# Altium PCB WIFI0320DD.PCBDOC (part 2 of 3)
Units mm, origin at the board's own origin, x right, y up, seen from the top; angles counter-clockwise.
Board outline 65.79 x 83.95 mm, 2 copper layers (Top Layer, Bottom Layer); 37 components, 30 nets, 200 pads, 45 vias.
Unrouted connection lines stored in the file: 2.
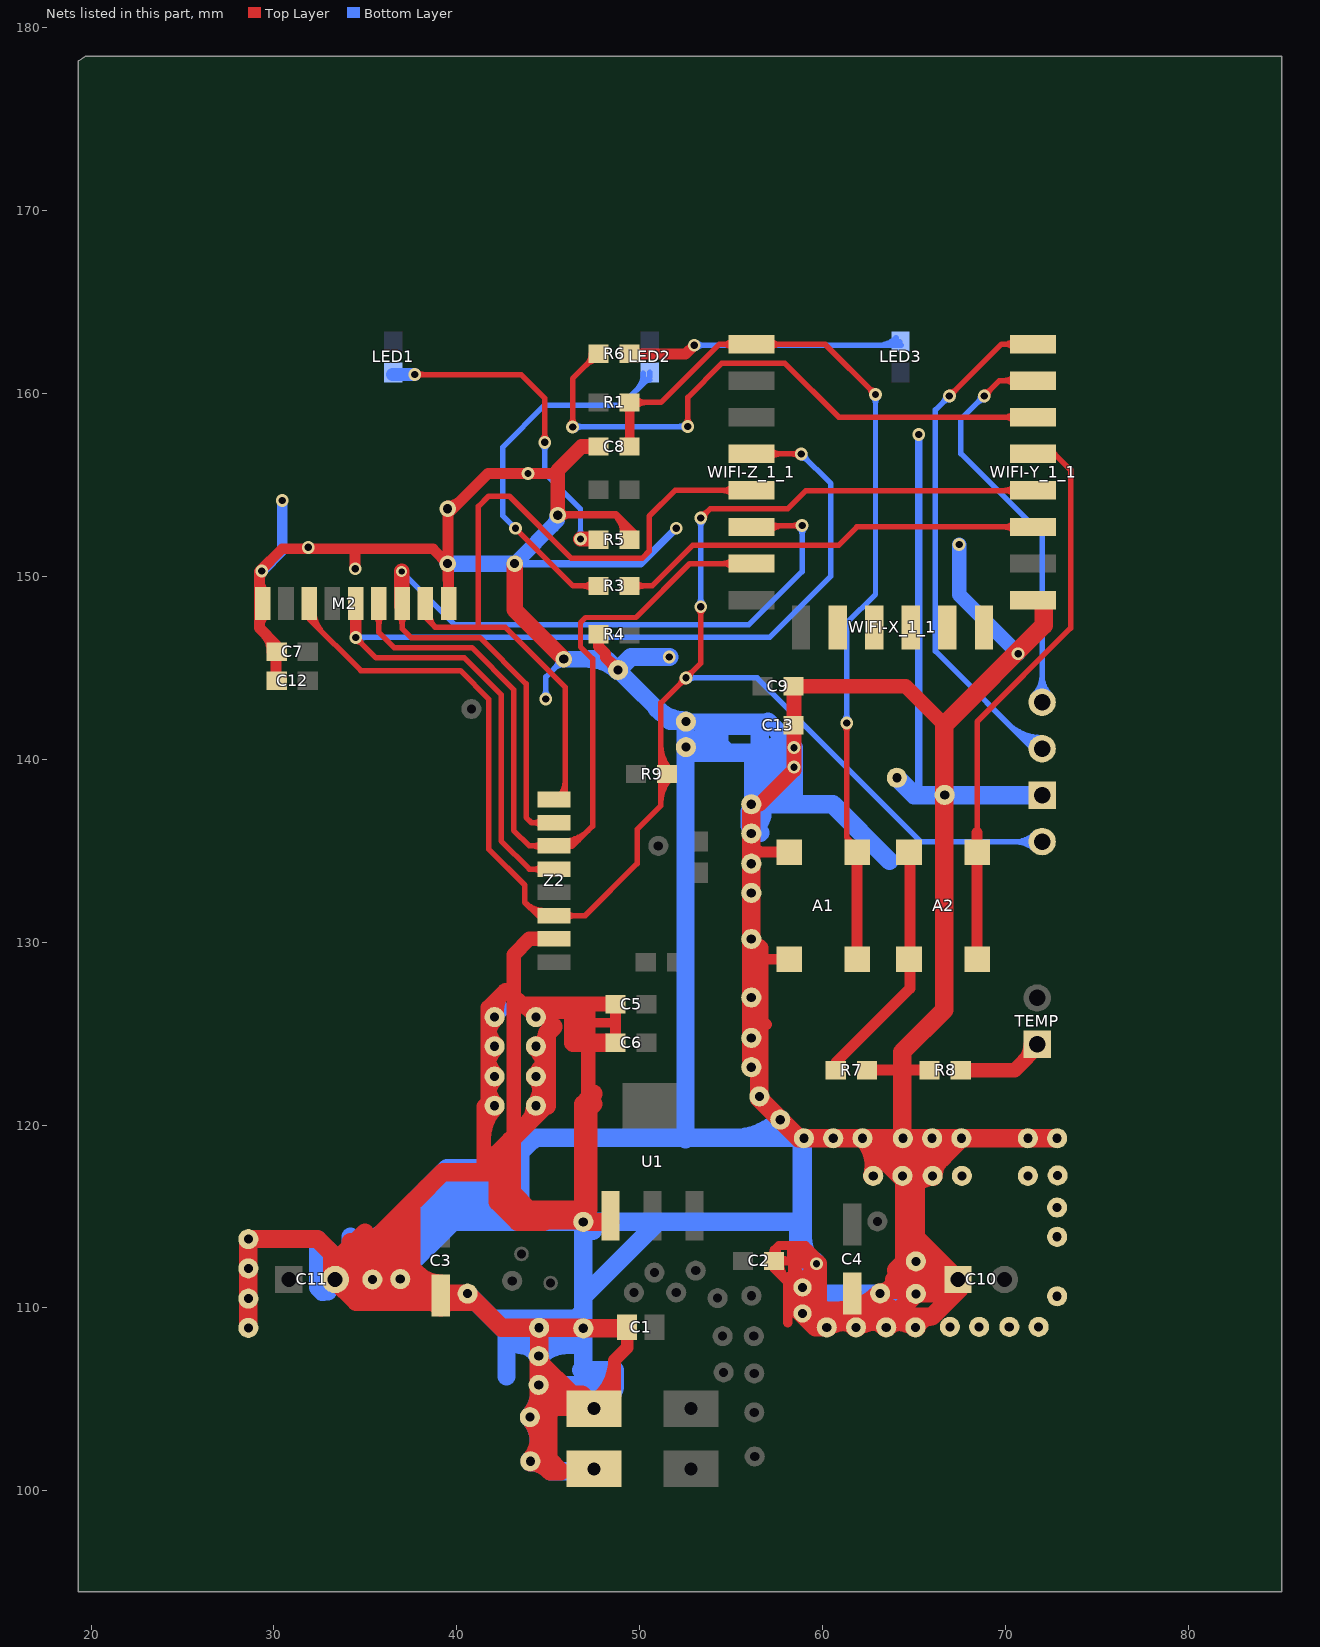
[diagram p2: the nets of this part, all layers, seen from the top]

## Via types
v1: diameter 0.7, hole 0.4, Top Layer to Bottom Layer, 39 vias
v2: diameter 0.9, hole 0.5, Top Layer to Bottom Layer, 5 vias
v3: diameter 0.6, hole 0.35, Top Layer to Bottom Layer, 1 vias

## Nets (pads, with @x,y where several pads share a name; then routed paths per layer and width w, separated by ;. In a path a pad name is that pad's centre, name@x,y a point inside that pad or via, vN(x,y) a via of type N, cw(c..) or ccw(c..) an arc to the next point about the centre after c; other vN are vias at no path point) (continued)
GND: ?.2 A1.2 A1.4 C1.1 C2.2 C3.2 C4.2 C5.2 C6.2 C7.1 C8.2 C9.2 C10.1 C11.2 C12.1 C13.2 M2.8 pad.0 pad.1@47.5,101.2 pad.1@47.5,104.5 pad.5@35.382,111.557 pad.5@36.906,111.582 pad.5@40.589,110.787 pad.5@44.475,105.791 pad.5@44.475,107.366 pad.5@44.499,108.915 pad.5@58.903,109.703 pad.5@58.903,111.125 pad.5@63.144,110.795 pad.5@65.1,110.769 pad.6@28.6,110.514 pad.6@28.6,113.765 pad.6@42.062,122.655 pad.6@42.062,125.907 pad.6@44.323,122.655 pad.6@44.323,125.907 pad.6@46.914,108.89 pad.6@46.914,114.706 pad.6@52.527,140.665 pad.6@56.1,124.764 pad.6@56.1,130.174 pad.6@56.1,132.691 pad.6@56.1,135.942 pad.6@60.225,108.941 pad.6@62.179,119.278 pad.6@62.765,117.221 pad.6@63.476,108.941 pad.6@65.1,112.549 pad.6@66.016,117.221 pad.6@66.675,138.049 pad.6@66.956,108.966 pad.6@67.589,119.278 pad.6@70.207,108.966 pad.6@71.221,117.221 pad.6@72.821,119.278 pad.6@72.822,115.493 pad.7 pad.8@43.993,104.032 pad.8@44.018,101.619 pad.8@56.1,126.974 pad.8@56.54,121.564 pad.8@57.683,120.294 pad.8@58.979,119.278 pad.8@64.389,119.278 R4.1 R5.2 R7.1 R8.2 U1.1 WIFI-Y_1_1.15 Z2.7 | length 1161
  Top Layer w0.4: pad.6@44.205,126 46.371,126 ; pad.6@44.57,125.659 cw(c45.394,124.836) 45.394,126 ; pad.6@44.57,126.154 ccw(c44.942,126.526) 44.942,126 ; v2@45.669,153.365 48.692,153.365 ; v2@45.694,153.163 cw(c46.182,152.675) 46.182,153.365 ; v2@45.694,153.517 ccw(c46.059,153.882) 46.059,153.365 ; R5.2@49.105,152.053 ccw(c47.64,152.313) 48.692,153.365 ; 49.234,152.823 cw(c48.561,152.149) R5.2@49.498,151.982 ; R5.2@49.734,151.716 49.734,152.323 48.692,153.365
  Top Layer w0.5: 47.611,125.592 48.555,125.592 ; C2.2@57.178,112.754 ccw(c56.8,113.154) 57.35,113.154 ; C2.2@57.522,112.754 cw(c57.9,113.154) 57.35,113.154 ; C2.2@57.577,112.396 cw(c58.004,111.969) 58.004,112.573 cw(c58.004,113.176) C2.2@57.577,112.75 ; C2.2@57.587,112.739 cw(c57.954,113.064) 57.607,113.411 ; C2.2@57.65,112.56 ccw(c59.157,112.48) 58.09,111.412 ; 58.09,109.195 58.09,111.125 ; 58.257,111.108 ccw(c58.257,111.771) pad.5@58.726,111.302 ; 58.341,111.108 cw(c58.341,110.564) pad.5@58.726,110.948 ; pad.5@58.736,111.312 ccw(c57.747,112.42) 59.233,112.42 ; pad.5@58.769,111.336 cw(c58.477,111.8) 58.09,111.412 ; pad.5@58.866,111.372 ccw(c58.816,111.709) 59.157,111.709 ; pad.5@58.901,111.375 ccw(c58.899,111.709) 59.233,111.709 59.233,112.42 ; pad.5@58.903,111.125 59.157,111.176 59.157,111.709 ; pad.5@59.03,111.108 58.395,111.108 ; 59.055,112.573 cw(c59.055,111.811) 59.594,112.35 cw(c59.178,111.934) 59.766,111.934 ; 59.224,113.242 cw(c58.403,112.42) 59.565,112.42 ccw(c59.139,112.42) 59.44,112.721 ; 59.233,111.588 cw(c60.05,111.588) v1@59.707,112.33 ; 59.461,111.76 59.512,111.709 59.512,112.268 v1@59.512,112.42 ; 59.512,110.566 59.741,110.795 59.766,110.82 59.766,112.573 v1@59.665,112.573 ; 59.512,111.811 cw(c60.274,111.811) v1@59.735,112.35 ; v1@59.609,112.504 cw(c59.311,112.956) 58.928,112.573 ; v1@59.728,112.498 cw(c60.102,112.954) 59.512,112.954 ; C2.2@57.35,112.573 57.35,113.154 ; C2.2@57.35,112.573 57.35,112.152 58.09,111.412 ; C2.2@57.35,112.573 58.445,112.573 ; 57.35,113.154 57.607,113.411 ; 57.607,113.411 59.055,113.411 59.512,112.954 ; 58.09,111.125 58.09,111.412 ; 58.09,111.125 58.107,111.108 58.395,111.108 ; 58.09,111.412 58.395,111.108 ; 58.09,111.412 58.09,111.709 58.445,111.709 ; 58.395,111.108 cw(c58.395,110.687) 58.713,110.962 ccw(c58.395,110.687) 58.395,111.108 ; 58.395,111.108 ccw(c58.395,111.474) 58.696,111.266 cw(c58.395,111.474) 58.395,111.108 ; 58.395,111.108 58.445,111.158 58.445,111.709 ; 58.445,111.709 59.157,111.709 ; 58.445,112.573 58.699,112.573 ; 58.445,112.573 58.598,112.42 59.08,112.42 ; 58.445,112.573 58.293,112.725 58.293,113.259 58.674,113.259 59.03,112.903 ; 58.699,112.573 58.814,112.687 ; 58.699,112.573 58.928,112.573 ; 58.699,112.573 58.572,112.7 58.572,112.928 58.814,112.687 ; 58.814,112.687 59.03,112.903 ; 58.814,112.687 58.928,112.573 ; 58.928,112.573 59.08,112.42 ; 58.928,112.573 59.233,112.573 ; 59.03,112.903 59.08,112.954 59.207,112.954 v1@59.512,112.649 ; 59.03,112.903 59.182,112.903 v1@59.512,112.573 ; 59.08,112.42 59.233,112.42 ; 59.233,112.42 v1@59.512,112.42 ; 59.233,112.42 59.233,112.573 ; 59.233,112.573 cw(c59.233,112.177) 59.577,112.371 ccw(c59.233,112.177) 59.233,112.573 ; 59.233,112.573 v1@59.512,112.573 ; v1@59.512,112.42 v1(59.665,112.42) v1@59.512,112.573 ; v1@59.512,112.42 v1@59.512,112.573 ; v1@59.512,112.573 v1@59.512,112.649 ; v1@59.512,112.573 v1@59.588,112.573 ; v1@59.512,112.649 v1@59.588,112.573 ; v1@59.512,112.649 59.512,112.954 ; 59.512,112.954 cw(c59.227,112.669) 59.578,112.47 ccw(c59.227,112.669) 59.512,112.954 ; 59.512,112.954 59.665,112.801 v1@59.665,112.573 ; v1@59.588,112.573 59.665,112.497 v1@59.665,112.573 ; v1@59.588,112.573 v1@59.665,112.573
  Top Layer w0.6: 29.21,147.307 cw(c30.119,147.307) M2.8@29.476,147.95 ; 29.21,149.719 ccw(c30.119,149.719) M2.8@29.476,149.077 ; 29.21,149.864 cw(c29.764,149.864) v1@29.372,150.256 ; 29.472,146.906 cw(c28.439,145.872) C7.1@29.9,145.872 ; C12.1@29.959,144.439 ccw(c29.558,144.839) 30.124,144.839 ; C7.1@29.959,145.731 cw(c29.558,145.331) 30.124,145.331 ; C12.1@30.29,144.297 30.124,144.463 30.124,146.253 29.21,147.168 29.21,150.266 30.455,151.511 38.684,151.511 39.55,150.645 pad.0@39.55,148.513 ; v1(34.442,150.419) 34.442,151.486 ; pad.5@36.906,111.832 ccw(c36.906,112.436) 37.333,112.009 ccw(c37.76,111.582) pad.5@37.156,111.582 ; pad.5@36.942,111.618 37.516,112.192 37.705,112.381 37.705,115.887 ; v2@39.387,150.596 cw(c38.994,150.203) 39.55,150.203 ; v2@39.497,153.845 ccw(c39.497,154.882) 40.23,154.149 ; 39.522,149.794 39.522,153.441 41.707,155.626 45.466,155.626 45.517,155.575 ; R4.1@47.75,146.837 47.75,146.157 48.126,145.781 48.126,145.575 pad.7@48.807,144.893 ; pad.7@48.569,144.882 ccw(c47.965,144.882) 48.392,145.308 ccw(c48.819,145.735) pad.7@48.819,145.132 ; C6.2@48.68,124.511 C5.2@48.68,126.6 ; 56.236,135.001 56.49,135.001 56.572,134.919 A1.4@58.166,134.919 ; 56.54,125.882 56.923,125.5 ; 56.54,129.134 56.608,129.066 A1.2@58.166,129.066 ; 56.54,129.667 56.591,129.718 ; R7.1@62.42,123 64.35,123 R8.2@65.85,123 ; pad.5@63.144,111.045 ccw(c63.144,111.648) 63.571,111.222 ccw(c63.998,110.795) pad.5@63.394,110.795 ; pad.5@63.321,110.618 cw(c63.748,110.191) 63.748,110.795 cw(c63.748,111.398) pad.5@63.321,110.972 ; pad.8@63.869,119.278 64.262,118.886 64.262,117.272 64.262,117.195 64.262,112.319 64.262,112.065 64.262,111.912 63.907,111.557 pad.5@63.144,110.795 pad.5@65.075,110.795 ; 64.262,113.727 ccw(c66.279,113.727) pad.6@64.853,112.301 ; 64.262,115.176 ccw(c67.727,115.176) pad.6@65.277,112.725 ; 64.262,116.37 cw(c65.216,116.37) pad.7@64.541,117.044 ; 64.262,118.072 ccw(c65.216,118.072) pad.7@64.541,117.398 ; 64.262,118.369 cw(c65.298,118.369) pad.8@64.566,119.102 ; 64.435,110.795 cw(c64.435,110.105) pad.5@64.923,110.593 ; WIFI-Y_1_1.15@72.104,148.702 WIFI-Y_1_1.15@72.104,148.749
  Top Layer w0.7: pad.1@47.593,105.007 ccw(c45.885,107.137) 48.616,107.137 ; pad.1@48.031,104.461 ccw(c47.055,105.679) 48.616,105.679 ; pad.1@48.616,104.14 48.616,107.137 ; C1.1@49.313,108.941 49.313,107.835 48.616,107.137 ; 58.445,111.709 58.445,112.573 ccw(c60.325,112.573) pad.5@59.008,111.232
  Top Layer w0.8: 41.478,119.283 cw(c43.835,119.283) pad.7@42.168,120.949 ; pad.7@41.707,121.435 cw(c43.283,121.435) pad.6@42.168,122.549 ; pad.6@41.707,122.276 ccw(c43.283,122.276) pad.7@42.168,121.161 ; 41.707,123.086 cw(c43.283,123.086) pad.7@42.168,124.201 ; 41.707,123.876 ccw(c43.283,123.876) pad.6@42.168,122.761 ; pad.7@41.707,124.686 cw(c43.283,124.686) pad.6@42.168,125.801 ; pad.6@41.707,125.527 ccw(c43.283,125.527) pad.7@42.168,124.413 ; pad.6@42.209,125.936 cw(c43.777,126.25) 42.647,127.381 41.707,126.441 41.707,121.26 41.478,121.031 41.478,117.97 42.024,117.424 42.228,117.22 43.104,116.345 ; 42.723,127.33 43.104,126.949 ; 43.104,115.646 43.104,116.345 ; 43.358,126.848 43.586,126.619 ; pad.6@44.205,126 43.586,126.619 ; pad.6@44.429,125.801 cw(c46.405,123.825) 46.405,126.619 ; Z2.7@45.314,130.18 43.972,130.18 43.104,129.311 43.104,126.949 ; v2(45.517,153.34) 45.517,155.575 45.517,155.804 46.813,157.1 C8.2@47.75,157.1 ; pad.6@46.808,114.812 ccw(c45.877,115.743) 47.193,115.743 ; C5.2@48.68,126.6 48.661,126.619 47.193,126.619 ; pad.7@56.566,137.542 58.432,139.408 v1(58.432,139.572) v1(58.432,140.639) 58.432,143.485 ; C9.2@58.406,143.993 64.541,143.993 66.65,141.884 ; 43.104,116.345 44.069,115.379 44.746,114.703 46.914,114.703 47.193,114.982 47.193,115.379 ; 43.104,116.345 43.104,119.329 43.104,126.949 ; 43.104,126.949 43.434,126.619 43.586,126.619 ; 43.586,126.619 47.193,126.619 ; 47.193,115.379 cw(c46.601,115.379) 46.851,114.842 ccw(c46.601,115.379) 47.193,115.379 ; 47.193,115.379 47.193,121.437 47.193,124.5 47.193,126.619
  Top Layer w0.9: v2(43.155,150.698) 43.155,148.174 v2(45.847,145.482)
  Top Layer w1: pad.7@28.6,108.914 pad.6@28.6,110.514 pad.7@28.6,112.165 pad.6@28.6,113.765 32.386,113.765 33.173,112.978 C11.2@33.173,111.734 ; 33.173,112.587 ccw(c34.381,112.587) C11.2@33.527,111.734 ; C11.2@33.35,111.807 ccw(c33.35,115.047) 35.641,112.756 ; C11.2@33.391,111.31 cw(c33.696,109.49) 35.001,110.795 ; C11.2@33.598,111.588 cw(c35.696,111.852) 34.201,113.347 ; C11.2@33.599,111.584 cw(c35.685,111.812) 34.201,113.297 ; 34.201,113.602 34.201,113.347 ; pad.5@35.36,111.512 ccw(c34.914,110.628) 34.214,111.328 34.341,111.455 ; pad.5@35.382,111.607 ccw(c35.382,112.402) 35.945,111.84 ; pad.5@35.393,111.606 ccw(c35.758,113.187) pad.5@36.906,112.039 ; pad.5@35.424,111.585 ccw(c36.906,112.581) 36.906,110.795 ; pad.5@35.432,111.557 cw(c37.822,111.557) 36.132,113.246 ; 36.144,113.767 36.906,113.767 36.906,113.335 ; 36.424,112.868 ccw(c38.192,112.868) 36.942,111.618 ccw(c38.913,113.567) C3.2@38.913,110.795 ; pad.5@36.869,111.616 cw(c35.001,113.33) 35.001,110.795 ; pad.5@36.91,111.532 cw(c37.113,108.995) C3.2@38.913,110.795 ; 37.705,115.887 39.243,117.424 42.024,117.424 42.228,117.424 ; 37.845,111.863 ccw(c39.114,113.132) C3.2@39.114,111.337 ; 38.333,116.54 37.135,115.341 ; 38.367,110.346 cw(c38.367,109.29) 39.114,110.037 cw(c39.861,109.29) 39.861,110.346 ; C3.2@39.405,110.346 ccw(c39.405,111.971) pad.5@40.554,110.822 ; 42.988,119.214 ccw(c44.702,117.5) 42.278,117.5 ccw(c44.761,117.5) 43.006,115.744 ; 43.879,120.105 ccw(c42.928,121.055) pad.7@44.273,121.055 ; pad.8@43.957,103.996 cw(c42.707,102.746) 44.475,102.746 ; pad.8@43.957,104.067 ccw(c42.707,105.318) pad.5@44.475,105.318 ; pad.8@43.958,103.996 cw(c41.565,101.519) 45.009,101.519 ; pad.8@43.986,104.081 ccw(c43.821,105.258) 45.009,105.258 ; pad.8@43.995,104.082 ccw(c44.085,105.857) 45.342,104.6 ; pad.8@44.018,101.569 cw(c44.018,100.144) 45.026,101.151 ; pad.8@44.028,101.57 cw(c44.382,99.78) 45.673,101.07 ; pad.7@44.288,121.091 ccw(c42.731,122.648) 44.933,122.648 ; pad.6@44.288,122.62 cw(c42.731,121.063) 44.933,121.063 ; pad.6@44.288,122.691 ccw(c42.731,124.248) 44.933,124.248 ; pad.7@44.288,124.271 cw(c42.731,122.714) 44.933,122.714 ; pad.6@44.291,122.617 cw(c43.725,121.92) pad.7@44.507,121.48 ; pad.7@44.319,124.356 ccw(c44.268,125.019) 44.933,125.019 ; pad.5@44.44,105.756 cw(c43.067,104.383) 45.009,104.383 ; 44.475,102.843 cw(c42.794,102.843) 43.983,101.654 ccw(c41.506,104.131) 45.009,104.131 ; pad.5@44.488,105.743 cw(c44.963,103.939) pad.1@46.282,105.258 ; pad.5@44.525,107.366 ccw(c45.375,107.366) 44.774,106.765 ; 44.746,114.703 44.047,114.703 ; 45.168,115.379 cw(c45.168,112.961) pad.6@46.878,114.671 ; 45.288,125.375 44.933,125.019 ; 45.482,105.719 cw(c44.372,103.796) pad.1@46.517,104.371 ; 45.666,105.032 45.666,104.6 ; pad.1@46.119,105.42 cw(c45.198,104.5) pad.1@46.5,104.5 ; pad.1@46.213,105.326 ccw(c47,106.113) pad.1@47,105 ; 46.371,126 46.366,125.995 46.366,124.5 47.193,124.5 C6.2@48.68,124.5 ; pad.6@46.914,108.89 pad.6@46.939,108.89 ; pad.6@46.914,114.703 U1.1@48.398,114.703 ; pad.6@46.914,114.706 46.914,115.379 ; pad.6@46.965,108.864 pad.6@46.939,108.89 ; 47.473,121.158 47.193,120.879 47.193,115.379 46.914,115.379 ; 47.473,121.717 47.193,121.437 46.914,121.158 46.914,115.379 ; pad.7@48.807,144.893 pad.7@48.819,144.882 ; C1.1@49.313,108.941 49.263,108.89 pad.6@46.939,108.89 ; pad.7@56.1,137.542 pad.6@56.1,135.942 pad.7@56.1,134.291 pad.6@56.1,132.691 pad.6@56.1,130.174 56.1,128.574 pad.8@56.1,126.974 pad.6@56.1,124.764 56.1,123.605 pad.7@56.54,123.164 ; 56.54,129.667 56.54,129.134 56.54,125.882 pad.7@56.54,123.164 ; 58.33,110.224 59.614,108.941 pad.6@60.225,108.941 ; 58.395,110.491 cw(c59.044,110.491) pad.5@58.903,111.125 ; 58.395,111.379 58.395,111.108 58.395,110.746 ; 58.822,110.515 ccw(c58.127,110.917) pad.5@58.903,111.125 ; pad.5@58.826,111.25 59.03,111.453 59.03,111.108 59.03,110.82 pad.5@58.956,110.746 ; pad.5@59.097,109.458 ccw(c60.225,110.586) pad.6@60.225,108.991 ; 59.316,110.128 cw(c60.313,111.125) pad.5@58.903,111.125 ; 59.512,109.785 ccw(c57.734,109.785) pad.5@58.903,111.125 ; 59.512,111.709 59.512,110.566 ; v1@59.512,112.268 v1(59.665,112.42) v1@59.741,112.42 ; 59.741,109.866 ccw(c58.376,109.866) pad.5@58.903,111.125 ; 59.741,110.224 ccw(c58.838,110.224) pad.5@58.903,111.125 ; 60.15,109.531 ccw(c60.15,111.601) C4.2@61.614,110.137 ; pad.6@60.18,108.964 ccw(c59.509,109.318) 60.046,109.855 ; pad.6@60.182,108.966 ccw(c59.556,109.34) 60.071,109.855 ; 60.279,109.531 cw(c60.279,107.395) pad.7@61.789,108.905 ; pad.6@60.666,109.127 cw(c61.094,108.341) pad.7@61.786,108.909 ; 60.755,109.855 ccw(c60.755,113.184) pad.5@63.109,110.83 ; 60.933,109.855 ccw(c60.933,110.818) C4.2@61.614,110.137 ; C4.2@61.148,109.855 cw(c61.148,106.612) 63.44,108.905 ccw(c61.93,107.395) 61.93,109.531 ; C4.2@61.614,110.787 C4.2@61.614,110.795 ; 61.77,109.531 ccw(c61.77,107.395) 60.26,108.905 cw(c62.553,106.612) 62.553,109.855 ; pad.7@61.782,108.914 ccw(c60.071,107.829) 60.071,109.855 ; pad.7@62.287,109.135 cw(c62.724,108.322) pad.6@63.437,108.909 ; 62.295,109.855 cw(c62.295,110.818) C4.2@61.614,110.137 ; pad.6@62.716,117.234 ccw(c60.696,117.795) pad.6@62.179,119.278 ; 63.078,109.531 cw(c63.078,111.601) C4.2@61.614,110.137 ; pad.5@63.194,110.797 ccw(c64.186,110.848) 64.186,109.855 ; 63.37,109.531 ccw(c63.37,107.395) 61.86,108.905 cw(c64.153,106.612) 64.153,109.855 ; pad.6@63.511,108.905 cw(c65.021,107.395) 65.021,109.531 ; pad.6@63.514,108.909 cw(c64.206,108.341) pad.7@64.635,109.127 ; 63.53,109.531 cw(c63.53,107.395) pad.7@65.04,108.905 ; 63.869,117.903 cw(c65.764,117.903) pad.8@64.424,119.243 ; 63.869,118.538 ccw(c65.681,118.538) pad.7@64.4,117.256 ; pad.7@64.329,117.186 cw(c62.836,115.692) 64.948,115.692 ; pad.7@64.35,117.173 cw(c64.094,116.359) 64.948,116.359 ; pad.7@64.361,117.171 cw(c64.295,116.368) 65.1,116.368 ; pad.7@64.365,117.271 ccw(c64.365,120.209) 66.442,118.131 ; 64.425,112.319 ccw(c64.425,113.224) pad.6@65.065,112.584 ; pad.6@65.051,112.555 cw(c63.907,112.712) 63.907,111.557 ; pad.5@65.053,110.752 ccw(c63.907,110.338) 63.907,111.557 ; pad.6@65.054,112.531 cw(c64.512,112.322) 64.922,111.912 ; pad.6@65.061,112.579 cw(c64.008,113.399) 64.008,112.065 ; pad.6@65.064,112.583 cw(c64.44,113.188) 64.44,112.319 ; pad.6@65.099,112.499 ccw(c65.057,111.016) 64.008,112.065 ; pad.5@65.1,110.769 pad.5@65.1,110.795 ; pad.6@65.102,112.499 cw(c65.182,109.454) C10.1@67.335,111.608 ; 65.103,116.793 cw(c66.016,115.881) pad.6@66.016,117.171 ; 65.114,118.72 pad.7@65.673,119.278 ; pad.7@65.123,108.924 cw(c65.97,108.637) 65.97,109.531 ; pad.5@65.136,110.734 cw(c67.122,108.747) C10.1@67.122,111.557 ; pad.6@65.138,112.581 ccw(c67.335,114.425) C10.1@67.335,111.557 ; 65.182,117.475 cw(c65.366,116.737) pad.6@65.976,117.191 ; 65.364,118.969 cw(c65.989,118.344) pad.7@65.989,119.228 ; 65.58,118.412 ccw(c64.713,119.278) pad.7@65.939,119.278 ; pad.6@66.066,117.221 cw(c67.356,117.221) 66.444,118.133 ; pad.6@66.066,117.222 cw(c67.284,117.239) 66.56,118.219 ; 66.552,110.113 ccw(c65.108,111.557) C10.1@67.15,111.557 ; 66.631,111.425 cw(c66.851,110.605) C10.1@67.275,111.34 ; C10.1@67.18,111.439 ccw(c65.202,110.38) pad.6@65.202,112.624 ; C10.1@67.216,111.726 cw(c65.1,113.663) pad.5@65.1,110.795 ; C10.1@67.4,111.557 C10.1@67.335,111.557 ; WIFI-Y_1_1.15@72.085,148.666 72.085,147.32 66.65,141.884 66.65,126.289 64.35,123.989 64.35,123 pad.8@64.35,119.278 ; pad.6@72.821,119.278 pad.7@71.221,119.278 pad.6@67.589,119.278 ; C11.2@33.173,111.734 ccw(c32.317,112.59) 33.528,112.59 cw(c32.317,112.59) C11.2@33.173,111.734 ; C11.2@33.35,111.557 34.976,113.182 ; C11.2@33.35,111.557 34.239,111.557 ; C11.2@33.35,111.557 33.35,111.481 34.484,110.346 41.03,110.346 ; C11.2@33.527,111.733 cw(c33.999,112.203) 33.528,112.674 ; C11.2@33.527,111.733 cw(c33.973,112.178) 33.528,112.624 ; 33.528,112.624 33.528,112.674 ; 33.528,112.624 34.201,113.297 ; 33.528,112.674 34.201,113.347 ; 34.201,113.297 34.201,113.347 ; 34.201,113.347 34.976,114.122 34.976,113.182 ; 34.239,111.557 34.341,111.455 ; 34.239,111.557 34.442,111.557 ; 34.341,111.455 cw(c34.881,110.915) 35.351,111.517 ccw(c34.881,110.915) 34.341,111.455 ; 34.341,111.455 35.001,110.795 ; 34.341,111.455 34.442,111.557 ; 34.442,111.557 pad.5@35.382,111.557 pad.5@35.662,111.557 ; 34.442,111.557 34.544,111.658 ; 34.544,111.658 36.424,113.538 36.424,112.497 ; 34.544,111.658 35.585,111.658 36.424,112.497 ; 34.976,113.182 37.135,115.341 ; 35.001,110.795 36.906,110.795 ; pad.5@35.662,111.557 36.424,112.319 ; pad.5@35.662,111.557 pad.5@36.424,111.557 ; pad.5@36.424,111.557 36.424,112.319 ; pad.5@36.424,111.557 pad.5@36.906,112.039 ; pad.5@36.424,111.557 pad.5@36.906,111.557 ; 36.424,112.319 ccw(c37.149,112.319) 36.922,111.63 cw(c37.149,112.319) 36.424,112.319 ; 36.424,112.319 36.906,112.801 ; 36.424,112.319 36.424,112.497 ; 36.424,112.497 ccw(c37.425,112.497) 36.931,111.626 cw(c37.425,112.497) 36.424,112.497 ; 36.906,110.795 C3.2@38.913,110.795 ; 36.906,110.795 pad.5@36.906,111.557 ; pad.5@36.906,111.557 pad.5@36.906,111.582 pad.5@36.906,112.039 ; pad.5@36.906,112.039 36.906,112.801 ; 36.906,112.801 37.516,112.192 C3.2@38.913,110.795 ; 36.906,112.801 36.906,113.335 ; 36.906,113.335 37.135,113.563 37.135,115.341 ; C3.2@38.913,110.795 C3.2@39.114,110.795 ; C3.2@38.913,110.795 39.021,110.687 C3.2@39.114,110.687 C3.2@39.114,110.787 ; C3.2@39.114,110.787 pad.5@40.589,110.787 ; C3.2@39.114,110.787 C3.2@39.114,110.795 ; C3.2@39.114,110.795 40.581,110.795 pad.5@40.589,110.787 ; pad.5@40.589,110.787 41.03,110.346 ; 41.03,110.346 42.461,108.915 pad.5@44.499,108.915 ; 42.228,116.522 43.104,115.646 43.37,115.379 ; 42.228,116.522 42.228,117.22 42.228,117.424 ; 42.228,116.522 42.228,115.81 42.659,115.379 ; 42.228,117.424 42.228,118.454 43.104,119.329 44.933,121.158 44.933,125.019 ; 42.659,115.379 43.37,115.379 ; 42.659,115.379 43.336,114.703 44.047,114.703 ; 43.37,115.379 44.047,114.703 ; 43.37,115.379 44.069,115.379 46.914,115.379 ; 44.475,103.734 44.475,101.702 45.107,101.07 45.673,101.07 ; 44.475,103.734 44.475,104.724 ; 44.475,103.734 45.009,104.267 ; 44.475,104.724 cw(c43.809,104.724) 43.98,104.08 ccw(c43.809,104.724) 44.475,104.724 ; 44.475,104.724 45.009,105.258 ; 44.475,104.724 pad.5@44.475,105.791 ; pad.5@44.475,105.791 pad.5@44.475,107.064 ; pad.5@44.475,105.791 45.009,105.258 ; pad.5@44.475,107.064 pad.1@46.282,105.258 ; pad.5@44.475,107.064 pad.5@44.475,107.366 44.499,107.366 pad.5@44.499,108.915 ; pad.5@44.499,108.915 46.914,108.915 pad.6@46.939,108.89 ; 45.009,104.267 cw(c44.372,104.904) 44.013,104.078 ccw(c44.372,104.904) 45.009,104.267 ; 45.009,104.267 45.009,101.734 45.673,101.07 ; 45.009,104.267 45.009,105.258 ; 45.009,104.267 45.342,104.6 ; 45.009,105.258 45.666,104.6 ; 45.342,104.6 45.666,104.6 ; 45.666,104.6 45.999,104.6 ; 45.999,104.6 pad.1@47.5,104.6 ; 45.999,104.6 pad.1@46.939,104.6 ; pad.1@46.282,105.258 pad.1@46.939,104.6 ; pad.1@46.282,105.258 46.842,105.258 pad.1@47.5,104.6 ; pad.1@46.939,104.6 pad.1@47.5,104.6 ; pad.7@56.54,123.164 pad.8@56.54,121.564 56.54,121.437 pad.8@57.683,120.294 58.699,119.278 pad.8@58.979,119.278 pad.7@60.579,119.278 pad.6@62.179,119.278 ; 58.395,110.746 ccw(c58.395,111.276) pad.5@58.903,111.125 ; 58.395,110.746 pad.5@58.956,110.746 ; 58.826,110.617 cw(c58.324,110.115) pad.5@58.903,109.703 ; 58.826,110.617 59.512,109.931 ; 58.826,110.617 pad.5@58.956,110.746 ; pad.5@58.903,109.703 cw(c59.507,110.195) pad.5@58.956,110.746 ; pad.5@58.903,109.703 ccw(c58.61,110.795) 59.741,110.795 ; pad.5@58.903,109.703 ccw(c58.793,110.414) 59.512,110.414 ; pad.5@58.903,109.703 cw(c59.286,108.904) 59.913,109.531 ; pad.5@58.903,109.703 ccw(c58.793,110.414) 59.512,110.414 ; pad.5@58.903,109.703 ccw(c58.596,110.566) 59.512,110.566 ; pad.5@58.903,111.125 ccw(c58.321,112.42) v1@59.741,112.42 ; pad.5@58.903,111.125 cw(c58.647,110.298) 59.512,110.298 ccw(c58.647,110.298) pad.5@58.903,111.125 ; pad.5@58.903,111.125 cw(c58.488,110.188) 59.512,110.188 ccw(c58.488,110.188) pad.5@58.903,111.125 ; pad.5@58.903,111.125 ccw(c58.903,110.617) 58.395,110.617 cw(c58.903,110.617) pad.5@58.903,111.125 ; pad.5@58.956,110.746 59.18,110.746 59.512,110.414 ; 59.512,109.931 59.512,110.414 ; 59.512,109.931 59.588,109.855 ; 59.512,110.414 59.741,110.185 ; 59.512,110.414 59.512,110.566 ; 59.588,109.855 60.046,109.855 ; 59.588,109.855 59.913,109.531 ; 59.741,110.16 cw(c58.675,109.094) 60.175,108.946 ccw(c58.67,109.115) 59.741,110.185 ; 59.741,110.16 59.741,110.185 ; 59.741,110.16 60.046,109.855 ; 59.741,110.185 59.741,110.795 ; 59.741,110.185 60.071,109.855 ; 59.741,110.795 v1@59.741,112.42 ; 59.913,109.531 65.97,109.531 ; 60.046,109.855 60.071,109.855 ; 60.071,109.855 64.186,109.855 ; pad.6@62.179,119.278 64.262,117.195 64.273,117.184 pad.7@64.35,117.184 ; pad.6@62.179,119.278 pad.8@63.869,119.278 ; pad.8@63.869,119.278 63.869,117.665 64.262,117.272 pad.7@64.35,117.184 ; pad.8@63.869,119.278 pad.8@64.35,119.278 ; 63.907,111.557 65.1,111.557 ; 64.008,112.065 64.262,112.065 ; 64.008,112.065 64.262,112.319 ; 64.186,109.855 65.075,110.744 65.075,110.795 pad.5@65.1,110.795 ; 64.262,112.065 ccw(c64.262,112.94) 65.055,112.57 cw(c64.262,112.94) 64.262,112.065 ; 64.262,112.065 64.643,112.065 ; 64.262,112.319 cw(c64.816,111.765) 65.083,112.502 ccw(c64.816,111.765) 64.262,112.319 ; 64.262,112.319 pad.6@64.948,113.005 ; 64.262,112.319 64.44,112.319 ; pad.7@64.35,117.184 pad.8@64.35,119.278 ; pad.7@64.35,117.184 64.948,116.586 ; pad.8@64.35,119.278 pad.8@64.389,119.278 pad.7@65.673,119.278 ; 64.44,112.319 64.668,112.09 ; 64.643,112.065 64.668,112.09 ; 64.643,112.065 64.491,111.912 64.922,111.912 ; 64.643,112.065 64.694,112.065 64.668,112.09 ; 64.668,112.09 pad.6@64.948,112.37 ; 64.922,111.912 65.049,112.039 64.948,112.141 pad.6@64.948,112.37 ; pad.6@64.948,112.37 pad.6@64.948,113.005 ; pad.6@64.948,112.37 pad.6@65.1,112.522 ; pad.6@64.948,113.005 65.1,113.157 ; pad.6@64.948,113.005 64.948,116.586 ; 64.948,116.586 65.1,116.434 65.1,113.843 ; pad.5@65.1,110.795 66.624,110.795 67.335,111.506 C10.1@67.335,111.557 ; pad.5@65.1,110.795 65.1,111.557 ; 65.1,111.557 pad.6@65.1,112.522 ; 65.1,111.557 C10.1@67.335,111.557 ; pad.6@65.1,112.522 65.1,113.157 ; pad.6@65.1,112.522 pad.6@65.202,112.624 ; 65.1,113.157 65.1,113.843 ; 65.1,113.843 C10.1@67.335,111.608 ; pad.6@65.202,112.624 66.269,112.624 C10.1@67.335,111.557 ; pad.7@65.673,119.278 pad.7@65.989,119.278 ; 65.97,109.531 67.513,111.074 67.513,111.379 C10.1@67.335,111.557 ; pad.7@65.989,119.278 pad.6@67.589,119.278 ; pad.7@65.989,119.278 65.989,118.821 65.1,117.932 65.1,116.79 pad.6@67.589,119.278 ; C10.1@67.335,111.557 C10.1@67.335,111.608 ; C11.2@33.527,111.38 cw(c34.199,110.708) 34.199,111.658 ccw(c34.199,110.708) C11.2@33.527,111.38 ; pad.8@43.99,103.982 cw(c43.957,103.464) 44.475,103.464 ccw(c43.957,103.464) pad.8@43.99,103.982 ; pad.5@44.463,105.743 cw(c44.279,105.037) 45.009,105.037 ccw(c44.279,105.037) pad.5@44.463,105.743 ; 59.943,109.501 cw(c59.382,108.941) 60.175,108.941 ccw(c59.382,108.941) 59.943,109.501
  Bottom Layer w0.3: v1@44.724,143.436 ccw(c44.383,143.778) 44.865,143.778 ccw(c45.348,143.778) v1@45.007,143.436 ; v1(44.865,143.295) 44.865,144.5 v2(45.847,145.482) ; v2@45.547,145.482 cw(c44.823,145.482) 45.335,144.97 cw(c45.847,144.457) v2@45.847,145.182
  Bottom Layer w0.4: v2(43.155,150.698) 50.063,150.698 v1(51.994,152.629) ; 65.253,138.04 v1(65.253,157.759)
  Bottom Layer w0.6: v1(29.337,150.292) 30.455,151.409 v1(30.455,154.153) ; pad.1@47.5,101.07 pad.1@47.5,101.2
  Bottom Layer w0.8: pad.6@42.062,125.907 42.52,126.364 ; v2(43.155,150.698) 45.517,153.06 v2(45.517,153.34) v2@45.517,153.518 ; 45.234,152.777 ccw(c44.672,153.34) v2@45.467,153.34 ; 59.03,112.547 pad.8@59.03,119.278 ; 59.03,113.833 ccw(c61.077,113.833) v1@59.629,112.385 ; v1(67.462,151.74) 67.462,148.996 v1(70.688,145.771)
  Bottom Layer w0.9: v2(39.493,150.702) v2(43.155,150.698) ; v2(45.847,145.482) 48.219,145.482 pad.7@48.819,144.882 51.638,142.062 52.502,142.062 pad.7@52.527,142.062 57.008,142.062
  Bottom Layer w1: 32.404,111.913 ccw(c33.574,111.913) 32.951,110.922 ; C11.2@33.103,111.592 ccw(c30.592,111.948) 32.385,113.741 33.325,112.801 ; C11.2@33.483,111.768 cw(c34.712,113.723) 32.404,113.723 32.404,111.127 32.647,110.883 32.702,110.883 33.972,112.154 ; C11.2@33.527,111.38 cw(c34.996,109.911) 34.996,111.989 ; C11.2@33.598,111.521 cw(c34.138,111.443) 34.138,111.989 ; 33.801,112.325 cw(c33.072,111.596) 34.093,111.451 ; 34.219,111.989 cw(c34.219,110.394) pad.5@35.347,111.521 ; 34.519,113.563 34.188,113.894 34.188,112.801 ; pad.5@35.332,111.556 ccw(c34.341,111.53) 34.341,112.522 ; 35.712,113.995 34.849,113.132 34.95,113.132 ; pad.5@36.906,111.582 pad.5@36.652,111.582 ; pad.5@36.956,111.582 cw(c37.69,111.582) 37.171,112.101 ; 37.008,113.69 40.234,116.916 42.037,116.916 42.977,117.856 42.977,115.976 ; 37.262,115.037 36.093,113.868 ; pad.5@40.589,110.787 41.957,109.419 ; 42.72,106.274 42.72,108.656 42.461,108.915 ; 43.162,109.419 cw(c43.162,107.577) pad.5@44.464,108.88 ; pad.8@43.957,104.067 ccw(c42.649,105.375) pad.5@44.499,105.375 ; pad.8@43.988,101.659 ccw(c43.241,102.641) 44.475,102.641 ; pad.8@43.993,104.082 ccw(c43.993,105.399) 44.924,104.468 ; pad.8@44.018,101.569 cw(c44.018,100.083) 45.069,101.133 ; 44.145,119.228 44.145,119.151 44.12,119.151 43.485,118.516 43.485,115.9 ; pad.5@44.43,107.344 ccw(c43.431,106.869) 43.431,107.975 ; pad.5@44.45,108.919 cw(c43.431,108.997) 43.431,107.975 ; 44.475,102.746 ccw(c42.707,102.746) 43.957,103.996 cw(c42.649,102.688) 44.499,102.688 ; pad.5@44.475,105.791 pad.5@44.499,105.791 ; pad.5@44.511,107.33 cw(c46.068,105.773) 46.068,107.975 ; pad.5@44.535,108.88 cw(c45.837,107.577) 45.837,109.419 ; pad.5@44.535,108.951 ccw(c46.889,111.305) 46.889,107.975 ; 44.586,107.975 ccw(c44.586,111.218) pad.6@46.878,108.925 ; 45.515,109.419 cw(c45.515,107.491) pad.6@46.878,108.854 ; 45.896,105.791 cw(c45.896,104.125) pad.1@47.473,104.661 ; pad.1@46.527,104.339 ccw(c44.499,103.65) pad.5@44.499,105.791 ; pad.1@46.714,104.91 cw(c46.236,105.594) 45.646,105.004 ; 46.784,106.604 46.914,106.604 ; 46.914,105.915 ccw(c48.415,105.915) pad.1@47.354,104.854 ; 47.249,145.482 cw(c47.249,143.312) 48.783,144.846 pad.7@48.819,144.882 49.53,145.593 v1(51.613,145.593) ; 47.434,114.211 pad.6@46.939,114.706 ; pad.1@47.5,101.07 45.132,101.07 44.475,101.727 44.475,102.641 ; pad.1@47.5,104.5 47.5,104.6 pad.1@47.4,104.6 ; pad.1@47.727,104.919 ccw(c46.631,106.604) 48.641,106.604 ; pad.1@47.939,104.996 ccw(c47.84,105.791) 48.641,105.791 ; 50.924,142.776 ccw(c52.527,144.379) pad.7@52.527,142.112 ; 52.502,119.228 pad.6@52.502,140.362 ; pad.7@52.502,142.062 pad.6@52.502,140.362 ; 53.784,141.542 54,141.326 54.356,141.326 54.356,140.793 54.788,140.362 ; 55.171,119.304 ccw(c55.171,122.807) pad.8@57.648,120.33 ; pad.6@56.007,136.36 cw(c57.408,136.36) pad.7@56.595,137.501 ; 56.007,136.858 cw(c56.646,136.858) pad.7@56.572,137.492 ; 56.21,138.521 ccw(c57.545,138.521) pad.7@56.601,137.577 ; pad.7@56.528,137.509 cw(c55.967,137.025) 56.491,136.501 ; pad.6@56.595,135.982 cw(c57.454,137.147) pad.7@56.007,137.147 ; 57.008,142.062 v1(58.432,140.639) v1(58.432,139.572) v1@58.42,139.56 ; 57.459,140.797 57.404,140.741 57.404,140.362 ; 57.683,138.709 cw(c58.756,138.709) v1@58.379,139.713 ; pad.8@57.733,120.297 ccw(c58.776,120.347) pad.8@58.776,119.304 ; 58.649,111.738 ccw(c59.516,111.738) pad.5@58.903,111.125 ccw(c59.7,111.922) 59.7,110.795 ; 58.801,114.097 58.852,114.046 ; pad.5@58.852,111.289 cw(c60.299,111.289) v1@59.591,112.551 ; 58.852,114.021 ccw(c61.265,114.021) v1@59.559,112.314 ; pad.8@59.03,119.278 pad.8@58.852,119.101 ; 63.652,134.443 60.554,137.542 58.42,137.542 ; pad.7@64.059,138.99 65.009,138.04 65.253,138.04 ?.2@72,138.04 ; pad.8@64.186,119.304 pad.8@64.262,119.228 ; pad.8@64.262,119.101 pad.8@64.44,119.278 ; C10.1@67.4,111.557 65.888,111.557 pad.5@65.1,110.769 63.17,110.769 pad.5@63.144,110.795 59.004,110.795 59.004,111.481 58.852,111.633 ; 33.325,112.801 34.188,112.801 ; 33.325,112.801 33.35,112.776 ; C11.2@33.35,111.557 33.376,111.582 pad.5@35.382,111.582 ; C11.2@33.35,111.557 33.35,112.776 ; C11.2@33.35,111.557 pad.5@35.382,111.557 pad.5@35.382,111.582 ; 33.35,112.776 33.972,112.154 ; 33.972,112.154 34.341,112.522 ; 33.972,112.154 34.138,111.989 ; 34.138,111.989 35.814,111.989 38.532,114.706 ; 34.188,112.801 34.62,112.801 ; 34.188,112.801 34.188,112.522 34.341,112.522 ; 34.341,112.522 34.62,112.801 ; 34.341,112.522 36.093,112.522 36.093,113.132 ; 34.62,112.801 34.95,113.132 ; 34.62,112.801 34.976,112.801 35.306,113.132 ; 34.95,113.132 39.472,117.653 39.827,117.653 ; 34.95,113.132 35.306,113.132 ; 35.306,113.132 36.093,113.132 ; 35.306,113.132 39.827,117.653 ; pad.5@35.382,111.582 pad.5@36.652,111.582 ; 36.093,113.132 36.093,113.386 ; 36.093,113.132 36.246,113.132 37.821,114.706 37.821,114.884 36.322,113.386 36.093,113.386 ; 36.093,113.386 36.093,113.868 ; 36.093,113.386 35.611,113.386 36.093,113.868 ; pad.5@36.652,111.582 39.776,114.706 ; 38.532,114.706 39.116,115.291 ; 38.532,114.706 39.776,114.706 ; 39.116,115.291 39.802,115.976 ; 39.116,115.291 39.7,115.291 40.386,115.976 ; 39.776,114.706 40.157,115.087 43.205,115.087 43.485,115.367 43.485,115.9 ; 39.776,114.706 pad.6@46.914,114.706 ; 39.802,115.976 40.386,115.976 ; 39.802,115.976 39.675,115.976 39.827,116.129 ; 39.802,115.976 39.903,116.078 ; 39.827,116.129 39.954,116.129 ; 39.827,116.129 40.284,116.586 40.411,116.586 ; 39.827,117.653 41.707,117.653 43.358,119.304 46.914,119.304 ; 39.903,116.078 39.954,116.129 ; 39.903,116.078 40.335,116.078 ; 39.954,116.129 40.411,116.586 ; 39.954,116.129 40.284,116.129 40.335,116.078 ; 40.335,116.078 42.012,116.078 42.52,116.586 40.411,116.586 ; 40.335,116.078 40.411,116.002 40.386,115.976 ; 40.386,115.976 42.977,115.976 ; 41.957,109.419 46.504,109.419 46.914,109.83 ; 41.957,109.419 42.461,108.915 ; 42.461,108.915 42.491,108.915 ; 42.491,108.915 pad.5@44.499,108.915 ; 42.491,108.915 43.431,107.975 ; 42.977,115.976 43.028,115.976 43.104,115.9 43.485,115.9 ; 42.977,115.976 42.977,115.392 43.485,115.9 ; 43.431,107.975 44.499,107.975 ; 44.475,102.641 44.475,104.019 pad.8@44.499,104.043 ; 44.475,102.641 44.499,102.665 pad.8@44.499,104.043 ; pad.8@44.499,104.043 pad.5@44.499,105.791 ; pad.8@44.499,104.043 45.057,104.6 pad.1@46.05,104.6 ; pad.5@44.499,105.791 44.499,107.975 ; pad.5@44.499,105.791 45.646,105.791 ; 44.499,107.975 46.914,107.975 ; 44.499,107.975 pad.5@44.499,108.915 ; pad.5@44.499,108.915 pad.6@46.914,108.915 ; 45.646,105.004 pad.1@46.05,104.6 ; 45.646,105.004 45.646,105.791 ; 45.646,105.791 46.914,105.791 ; pad.1@46.05,104.6 pad.1@47.4,104.6 ; pad.1@46.646,104.854 ccw(c46.001,105.499) pad.1@46.914,105.499 ; pad.1@46.646,104.854 ccw(c46.001,105.499) pad.1@46.914,105.499 ; pad.1@46.646,104.854 ccw(c46.001,105.499) pad.1@46.914,105.499 ; 46.914,105.791 ccw(c48.128,105.791) 47.329,104.876 cw(c48.128,105.791) 46.914,105.791 ; 46.914,105.791 48.641,105.791 ; 46.914,105.791 46.914,106.604 ; 46.914,105.791 46.914,105.086 pad.1@47.4,104.6 ; 46.914,106.604 46.914,107.975 ; 46.914,106.604 48.641,106.604 ; 46.914,107.975 pad.6@46.914,108.89 pad.6@46.914,108.915 ; pad.6@46.914,108.915 46.914,109.83 ; 46.914,109.83 46.914,110.617 ; 46.914,110.617 pad.6@46.914,114.706 ; 46.914,110.617 51.003,114.706 ; pad.6@46.914,114.706 pad.6@46.939,114.706 ; pad.6@46.914,114.706 46.914,119.304 ; 46.914,119.304 pad.8@58.776,119.304 ; pad.6@46.939,114.706 51.003,114.706 ; 48.641,105.791 48.641,106.604 ; 51.003,114.706 58.649,114.706 pad.5@58.649,110.795 ; pad.6@52.502,140.362 54.304,140.362 ; pad.6@52.502,140.362 53.403,141.263 ; 53.403,141.263 54.304,140.362 ; 53.403,141.263 53.974,141.834 ; 53.974,141.834 54.101,141.961 56.439,141.961 56.566,141.834 ; 53.974,141.834 56.566,141.834 ; 54.304,140.362 54.788,140.362 ; 54.788,140.362 56.21,140.362 ; pad.7@56.007,137.147 pad.7@56.369,137.509 ; pad.7@56.007,137.147 56.007,136.501 56.491,136.501 ; pad.7@56.21,137.669 pad.7@56.566,137.542 ; pad.7@56.21,137.668 pad.7@56.369,137.509 ; pad.7@56.21,137.668 56.21,140.362 ; pad.7@56.21,137.669 56.21,140.362 ; 56.21,140.362 56.566,140.362 ; pad.7@56.369,137.509 pad.7@56.566,137.706 ; pad.7@56.369,137.509 56.566,137.312 56.566,136.576 56.491,136.501 ; pad.7@56.566,137.542 pad.7@56.566,137.706 ; pad.7@56.566,137.542 58.42,137.542 ; pad.7@56.566,137.706 56.566,139.751 ; pad.7@56.566,137.706 57.429,138.57 ; 56.566,139.751 56.566,140.362 ; 56.566,139.751 57.404,138.913 ; 56.566,140.362 56.566,141.834 ; 56.566,140.362 57.404,140.362 ; 57.404,138.913 57.404,140.362 ; 57.404,138.913 57.404,138.887 57.429,138.887 ; 57.404,138.913 57.429,138.887 ; 57.404,140.362 57.478,140.362 57.683,140.157 57.683,139.141 57.429,138.887 ; 57.429,138.57 57.429,138.887 ; 57.429,138.57 57.429,138.533 58.42,137.542 ; 57.429,138.57 v1@58.42,139.56 ; 58.42,137.542 v1@58.42,139.56 ; pad.5@58.649,110.795 cw(c57.899,110.045) pad.5@58.903,109.703 ccw(c58.324,110.115) 58.826,110.617 ; pad.5@58.649,110.795 58.826,110.617 ; pad.8@58.776,119.304 58.852,119.228 pad.8@58.852,119.101 ; 58.826,110.617 58.852,110.642 58.852,111.633 ; 58.852,111.633 58.852,114.046 ; 58.852,114.046 pad.8@58.852,119.101
  other v1: 31.877,151.587 43.891,155.626
  other v2: 39.497,153.695
GO0: ?.1 M2.6 R9.2 WIFI-Y_1_1.18 Z2.6 | length 114.7
  Top Layer w0.3: M2.6@31.903,148.038 ccw(c32.718,148.038) 32.142,147.462 ; M2.6@31.928,148.513 31.928,147.676 34.754,144.849 40.19,144.849 41.758,143.281 41.758,135.077 43.713,133.121 43.713,132.182 ; M2.6@32.203,148.038 ccw(c33.742,148.038) 32.654,146.95 ; 44.217,131.678 ccw(c44.828,132.29) Z2.6@44.839,131.425 ; Z2.6@44.835,131.725 cw(c44.816,133.284) 43.713,132.182 ; Z2.6@45.983,131.256 cw(c46.453,130.786) 46.453,131.45 cw(c46.453,132.114) Z2.6@45.983,131.644 ; 51.156,137.642 cw(c52.997,137.642) R9.2@51.695,138.945 ; 51.156,138.366 cw(c52.273,138.366) R9.2@51.483,139.157 ; 51.156,140.018 ccw(c52.273,140.018) R9.2@51.483,139.227 ; 51.156,140.742 ccw(c52.997,140.742) R9.2@51.695,139.439 ; v1@52.327,144.45 cw(c51.844,144.45) 52.186,144.108 cw(c52.527,143.767) v1@52.527,144.25 ; v1@52.527,144.65 ccw(c52.527,145.133) 52.869,144.791 ccw(c53.21,144.45) v1@52.727,144.45 ; v1@53.199,148.195 cw(c52.857,147.853) 53.34,147.853 cw(c53.823,147.853) v1@53.481,148.195 ; v1(53.34,148.336) 53.34,145.263 v1(52.527,144.45) 51.156,143.078 51.156,137.465 49.86,136.169 49.86,134.29 47.02,131.45 Z2.6@45.314,131.45 44.445,131.45 43.713,132.182 ; v1(53.34,153.187) 53.848,153.695 58.09,153.695 59.08,154.686 WIFI-Y_1_1.18@72.104,154.686 ; v1@53.34,153.387 ccw(c53.34,153.87) 53.681,153.529 ccw(c54.023,153.187) v1@53.54,153.187 ; 69.87,154.686 ccw(c69.87,155.586) WIFI-Y_1_1.18@70.507,154.949 ; 69.948,154.686 cw(c69.948,153.896) WIFI-Y_1_1.18@70.507,154.455
  Bottom Layer w0.3: v1(52.527,144.45) 56.413,144.45 65.38,135.484 ?.1@72,135.484 ; v1@52.669,144.308 cw(c53.01,143.967) 53.01,144.45 cw(c53.01,144.933) v1@52.669,144.591 ; v1@53.199,148.477 ccw(c52.857,148.819) 53.34,148.819 ccw(c53.823,148.819) v1@53.481,148.477 ; v1(53.34,148.336) v1(53.34,153.187) ; 70.512,135.484 ccw(c70.512,136.988) ?.1@71.576,135.924 ; 70.591,135.484 cw(c70.591,134.091) ?.1@71.576,135.076 ; 71.236,135.484 ccw(c71.236,136.264) ?.1@71.788,135.712 ; 53.34,152.705 cw(c53.823,152.705) 53.481,153.046 ccw(c53.823,152.705) 53.34,152.705 ; 53.34,152.705 ccw(c52.857,152.705) 53.199,153.046 cw(c52.857,152.705) 53.34,152.705
GO2: R3.2 WIFI-Y_1_1.17 | length 26.3
  Top Layer w0.3: R3.2@49.45,149.479 50.673,149.479 52.908,151.714 60.884,151.714 61.872,152.702 WIFI-Y_1_1.17@72.104,152.702 ; R3.2@49.776,149.264 cw(c50.216,148.922) 50.216,149.479 cw(c50.216,150.036) R3.2@49.776,149.694 ; WIFI-Y_1_1.17@70.507,152.455 ccw(c69.909,151.857) 69.909,152.702 ccw(c69.909,153.547) WIFI-Y_1_1.17@70.507,152.949
GO9: WIFI-X_1_1.11
GO10: WIFI-X_1_1.12
IRQ: M2.1 WIFI-Z_1_1.5 Z2.1 | length 45.6
  Top Layer w0.3: M2.1@38.278,148.513 38.278,147.752 38.821,147.209 ; M2.1@38.55,148.003 ccw(c39.492,147.88) 38.821,147.209 ; 41.173,147.209 41.173,153.822 41.732,154.381 42.875,154.381 46.253,151.003 50.14,151.003 50.521,151.384 50.521,153.289 51.934,154.702 WIFI-Z_1_1.5@56.106,154.702 ; Z2.1@45.314,137.8 45.923,137.8 45.923,143.942 42.656,147.209 38.821,147.209 ; Z2.1@45.594,137.994 ccw(c44.8,138.789) 45.923,138.789 ; WIFI-Z_1_1.5@55.109,154.455 ccw(c54.511,153.857) 54.511,154.702 ccw(c54.511,155.547) WIFI-Z_1_1.5@55.109,154.949
LED1: R6.1 WIFI-Y_1_1.20 | length 39.6
  Top Layer w0.3: v1@46.188,158.307 ccw(c45.847,158.649) 46.33,158.649 ccw(c46.812,158.649) v1@46.471,158.307 ; v1(46.33,158.166) 46.33,160.807 R6.1@47.676,162.154 ; 47.102,161.579 ccw(c46.502,162.179) R6.1@47.35,162.179 ; 47.105,161.582 cw(c47.7,160.987) R6.1@47.7,161.829 ; v1@52.487,158.333 ccw(c52.146,158.674) 52.629,158.674 ccw(c53.112,158.674) v1@52.77,158.333 ; v1(52.629,158.191) 52.629,159.791 54.483,161.646 57.937,161.646 60.881,158.702 WIFI-Y_1_1.20@72.104,158.702 ; WIFI-Y_1_1.20@70.507,158.455 ccw(c69.909,157.857) 69.909,158.702 ccw(c69.909,159.547) WIFI-Y_1_1.20@70.507,158.949
  Bottom Layer w0.3: v1@46.33,158.191 v1(52.629,158.191) ; v1@46.471,158.024 cw(c46.874,157.622) 46.874,158.191 ; v1@46.471,158.307 ccw(c46.751,158.587) 46.751,158.191 ; v1@52.487,158.05 ccw(c52.146,157.708) 52.146,158.191 ccw(c52.146,158.674) v1@52.487,158.333
MISO: M2.2 WIFI-Z_1_1.6 Z2.2 | length 54.6
  Top Layer w0.3: M2.2@36.813,147.844 cw(c36.344,147.374) 37.008,147.374 cw(c37.672,147.374) M2.2@37.202,147.844 ; M2.2@36.982,148.361 37.008,148.336 37.008,147.142 37.495,146.655 41.254,146.655 43.79,144.12 43.79,136.825 44.084,136.53 Z2.2@45.314,136.53 ; Z2.2@44.644,136.336 ccw(c44.175,135.866) 44.175,136.53 ccw(c44.175,137.194) Z2.2@44.644,136.724 ; WIFI-Z_1_1.6@56.706,152.702 56.785,152.781 v1(58.877,152.781) ; WIFI-Z_1_1.6@57.104,152.455 cw(c57.892,151.666) 57.892,152.781 ; WIFI-Z_1_1.6@57.104,152.949 ccw(c57.51,153.356) 57.51,152.781 ; v1@58.736,152.64 ccw(c58.394,152.298) 58.394,152.781 ccw(c58.394,153.264) v1@58.736,152.922
  Top Layer w0.86: M2.2@36.982,148.361 v3(36.982,150.266)
  Bottom Layer w0.3: v3@36.982,150.116 cw(c36.982,149.754) 37.238,150.01 cw(c37.495,150.266) v3@37.132,150.266 ; v3(36.982,150.266) 39.903,147.345 55.956,147.345 58.877,150.266 v1(58.877,152.781) ; v1@58.736,152.64 cw(c58.394,152.298) 58.877,152.298 cw(c59.36,152.298) v1@59.019,152.64
MISO-W: WIFI-X_1_1.10
MOSI: M2.3 WIFI-Z_1_1.7 Z2.3 | length 52.4
  Top Layer w0.3: M2.3@35.543,147.844 cw(c35.074,147.374) 35.738,147.374 cw(c36.402,147.374) M2.3@35.932,147.844 ; M2.3@35.738,148.513 35.738,146.939 36.576,146.101 40.818,146.101 43.104,143.815 43.104,136.119 43.962,135.26 Z2.3@45.314,135.26 46.335,135.26 ; Z2.3@44.644,135.066 ccw(c44.175,134.596) 44.175,135.26 ccw(c44.175,135.924) Z2.3@44.644,135.454 ; Z2.3@45.789,135.235 ccw(c45.789,136.493) 46.678,135.603 ; Z2.3@45.789,135.535 ccw(c45.789,137.517) 47.19,136.116 ; Z2.3@46.01,135.096 cw(c46.335,134.856) 46.335,135.26 ; Z2.3@46.01,135.424 ccw(c46.335,135.664) 46.335,135.26 ; WIFI-Z_1_1.7@55.109,150.455 ccw(c54.511,149.857) 54.511,150.702 ccw(c54.511,151.547) WIFI-Z_1_1.7@55.109,150.949 ; WIFI-Z_1_1.7@56.706,150.702 52.734,150.702 49.784,147.752 47.043,147.752 46.761,147.47 46.761,146.15 47.422,145.49 47.422,136.347 46.335,135.26
MOSI-W: WIFI-X_1_1.13
R5: LED1.1 R5.1 | length 21.4
  Top Layer w0.3: v1(37.694,161.036) 43.51,161.036 44.806,159.741 v1(44.806,157.328) ; v1@37.835,160.895 cw(c38.176,160.553) 38.176,161.036 cw(c38.176,161.519) v1@37.835,161.177 ; v1@44.664,157.469 ccw(c44.323,157.81) 44.806,157.81 ccw(c45.288,157.81) v1@44.947,157.469
  Top Layer w0.8: v1(46.761,152.044) R5.1@47.75,152.044
  Bottom Layer w0.3: v1@44.664,157.186 cw(c44.323,156.845) 44.806,156.845 cw(c45.288,156.845) v1@44.947,157.186 ; v1(44.806,157.328) 44.806,155.651 46.761,153.695 v1(46.761,152.044) ; v1@46.62,152.186 ccw(c46.279,152.527) 46.761,152.527 ccw(c47.244,152.527) v1@46.903,152.186
  Bottom Layer w0.7: LED1.1@36.474,161.036 v1(37.694,161.036)
R6: LED3.1 R6.2 | length 17.9
  Top Layer w0.6: R6.2@49.45,162.154 52.502,162.154 v1(52.984,162.636) ; R6.2@49.641,162.32 ccw(c50.044,162.723) 50.044,162.154
  Bottom Layer w0.3: v1(52.984,162.636) LED3.1@64.287,162.636 ; v1@53.126,162.495 cw(c53.467,162.153) 53.467,162.636 cw(c53.467,163.119) v1@53.126,162.778 ; 63.02,162.636 ccw(c63.02,164.04) LED3.1@64.013,163.047 ; 63.744,162.636 ccw(c63.744,163.316) LED3.1@64.225,162.835
R7: LED2.1 R3.1 | length 23.1
  Top Layer w0.3: v1(43.205,152.629) 46.355,149.479 R3.1@47.75,149.479 ; R3.1@47.453,149.232 ccw(c46.855,148.634) 46.855,149.479 ccw(c46.855,150.324) R3.1@47.453,149.726
  Bottom Layer w0.3: v1(43.205,152.629) 42.52,153.314 42.52,157.074 44.806,159.36 48.997,159.36 50.55,160.913 LED2.1@50.55,161.15 ; 49.82,160.183 ccw(c48.904,161.1) LED2.1@50.2,161.1 ; LED2.1@50.272,160.635 cw(c50.55,160.356) LED2.1@50.55,160.75
R8: A2.2 A2.4 R7.2 | length 13.6
  Top Layer w0.6: R7.2@60.72,123 60.72,123.432 64.765,127.478 64.765,134.873 A2.4@64.719,134.919
RXD: ?.3 WIFI-Y_1_1.22 | length 35.9
  Top Layer w0.3: v1@66.929,160.068 ccw(c66.929,160.612) 67.314,160.227 ; v1@66.942,159.855 69.782,162.695 WIFI-Y_1_1.22@72.104,162.695 ; v1@67.129,159.868 cw(c67.551,159.868) 67.252,160.166 ; WIFI-Y_1_1.22@70.507,162.448 ccw(c69.909,161.85) 69.909,162.695 ccw(c69.909,163.54) WIFI-Y_1_1.22@70.507,162.943
  Bottom Layer w0.3: v1@66.729,159.868 cw(c66.246,159.868) 66.588,159.526 cw(c66.929,159.185) v1@66.929,159.668 ; v1(66.929,159.868) 66.167,159.106 66.167,145.913 ?.3@71.75,140.33 ; 70.122,141.958 ccw(c72,143.836) ?.3@72,141.18 ; 70.634,141.446 ccw(c72,142.811) ?.3@72,140.88 ; 71.146,140.934 ccw(c72,141.787) ?.3@72,140.58
SCK: M2.4 WIFI-Z_1_1.4 Z2.4 | length 65.5
  Top Layer w0.3: v1@34.468,146.46 cw(c34.468,145.977) 34.809,146.318 cw(c35.151,146.66) v1@34.668,146.66 ; v1(34.468,146.66) 35.58,145.547 40.406,145.547 42.418,143.535 42.418,135.534 43.962,133.99 Z2.4@45.314,133.99 ; Z2.4@44.644,133.796 ccw(c44.175,133.326) 44.175,133.99 ccw(c44.175,134.654) Z2.4@44.644,134.184 ; WIFI-Z_1_1.4@56.106,156.702 56.115,156.693 v1(58.826,156.693) ; WIFI-Z_1_1.4@57.104,156.455 cw(c57.678,155.88) 57.678,156.693 ; WIFI-Z_1_1.4@57.104,156.949 ccw(c57.724,157.57) 57.724,156.693 ; v1@58.685,156.551 ccw(c58.344,156.21) 58.344,156.693 ccw(c58.344,157.175) v1@58.685,156.834
  Top Layer w0.62: v1(34.468,146.66) M2.4@34.468,148.513
  Bottom Layer w0.3: v1(34.468,146.66) 57.099,146.66 60.452,150.012 60.452,155.067 v1(58.826,156.693) ; v1@34.609,146.518 cw(c34.951,146.177) 34.951,146.66 cw(c34.951,147.142) v1@34.609,146.801 ; v1@58.826,156.493 cw(c58.826,156.01) 59.168,156.351 cw(c59.509,156.693) v1@59.026,156.693
SCK-W: WIFI-X_1_1.14
TEMP: R8.1 TEMP.1 | length 6
  Top Layer w0.8: R8.1@67.55,123 70.498,123 TEMP.1@71.933,124.435 ; 71.006,123.508 ccw(c70.105,124.409) TEMP.1@71.38,124.409
TXD: ?.4 WIFI-Y_1_1.21 | length 28.8
  Top Layer w0.3: v1(68.834,159.868) 69.668,160.702 71.218,160.702 71.425,160.909 71.349,160.909 71.349,160.702 WIFI-Y_1_1.21@72.104,160.702 ; v1@68.834,160.068 ccw(c68.834,160.55) 69.175,160.209 ccw(c69.517,159.868) v1@69.034,159.868 ; WIFI-Y_1_1.21@70.507,160.455 ccw(c69.909,159.857) 69.909,160.702 ccw(c69.909,161.547) WIFI-Y_1_1.21@70.507,160.949
  Bottom Layer w0.3: v1@68.634,159.868 cw(c68.151,159.868) 68.493,159.526 cw(c68.834,159.185) v1@68.834,159.668 ; v1(68.834,159.868) 67.564,158.598 67.564,156.718 72,152.282 ?.4@72,143.12 ?.4@71.5,143.12 ; ?.4@71.576,143.544 ccw(c70.551,144.569) 72,144.569 ccw(c73.449,144.569) ?.4@72.424,143.544
WRST: A1.1 A1.3 C8.1 R1.1 WIFI-Z_1_1.1 | length 59
  Top Layer w0.3: R1.1@49.45,159.512 51.156,159.512 54.335,162.691 60.143,162.691 v1(62.89,159.944) ; R1.1@49.747,159.265 cw(c50.345,158.667) 50.345,159.512 cw(c50.345,160.357) R1.1@49.747,159.759 ; WIFI-Z_1_1.1@55.109,162.444 ccw(c54.511,161.846) 54.511,162.691 ccw(c54.511,163.536) WIFI-Z_1_1.1@55.109,162.939 ; WIFI-Z_1_1.1@57.104,162.444 cw(c57.701,161.846) 57.701,162.691 cw(c57.701,163.536) WIFI-Z_1_1.1@57.104,162.939 ; v1@61.174,141.845 cw(c60.833,141.503) 61.316,141.503 cw(c61.798,141.503) v1@61.457,141.845 ; v1(61.316,141.986) 61.316,135.738 A1.3@62.078,134.976 ; v1@62.69,159.944 ccw(c62.208,159.944) 62.549,160.285 ccw(c62.89,160.627) v1@62.89,160.144
  Top Layer w0.5: C8.1@49.273,157.277 ccw(c48.846,157.704) 49.45,157.704 ccw(c50.054,157.704) C8.1@49.627,157.277 ; R1.1@49.273,159.335 cw(c48.846,158.908) 49.45,158.908 cw(c50.054,158.908) R1.1@49.627,159.335 ; C8.1@49.45,157.1 R1.1@49.45,159.512
  Top Layer w0.6: A1.1@61.874,129.007 A1.3@61.874,134.899
  Bottom Layer w0.3: v1@61.174,142.127 ccw(c60.833,142.469) 61.316,142.469 ccw(c61.798,142.469) v1@61.457,142.127 ; v1(61.316,141.986) 61.316,147.447 62.89,149.022 v1(62.89,159.944) ; v1@62.749,159.802 cw(c62.408,159.461) 62.89,159.461 cw(c63.373,159.461) v1@63.032,159.802
XHDM: A2.1 A2.3 WIFI-Y_1_1.19 | length 33.4
  Top Layer w0.3: A2.3@68.453,134.772 68.453,142.062 73.558,147.168 73.558,155.829 72.685,156.702 WIFI-Y_1_1.19@70.622,156.702
  Top Layer w0.6: A2.1@68.446,129.066 A2.3@68.446,134.919 68.446,135.984

## Polygon pours and split planes (outlines as drawn)
GND on Bottom Layer "Top Layer-No Net" (solid, remove dead copper, pour order 14): 26.187,109.652 26.187,115.01 38.508,115.01 40.363,116.924 40.642,117.213 40.642,142.499 40.642,161.673 40.921,161.961 74.221,161.961 74.221,109.676 74.204,109.659 74.195,109.649 74.195,108.793 74.195,108.741 73.433,107.954 73.084,107.593 72.204,107.593 27.999,107.593 27.993,107.586 27.967,107.613 27.332,107.613 27.205,107.613 26.52,108.321 26.187,108.664 26.187,109.652
GND on Bottom Layer "Top Layer-No Net" (solid, remove dead copper, pour order 16): 41.631,143.942 27.915,143.942 28.026,144.151 28.026,155.045 28.026,161.557 27.982,161.64 28.094,161.849 40.78,161.849 40.78,146.279 40.601,145.945
GND on Bottom Layer "Top Layer-No Net" (solid, remove dead copper, pour order 10): 42.329,107.716 49.251,107.716 49.301,107.768 49.276,107.742 49.276,99.087 43.99,99.087 43.914,99.008 43.864,99.061 43.16,99.061 43.009,99.061 42.304,99.8 41.932,100.189 41.932,100.987 41.932,107.841 41.926,107.847
5V on Bottom Layer "Top Layer-No Net" (solid, remove dead copper, pour order 11): 51.13,105.431 51.205,105.502 54.985,105.502 55.993,105.502 57.404,106.842 57.48,106.77 58.387,106.77 58.387,100.982 58.356,100.952 58.336,100.934 58.336,99.978 57.984,99.978 57.278,99.308 57.026,99.069 56.372,99.069 51.205,99.069 51.13,99.141 51.079,99.189 51.079,105.144
GND on Top Layer "Top Layer-No Net" (solid, remove dead copper, pour order 14): 26.16,109.569 26.16,114.927 38.481,114.927 40.335,116.842 40.615,117.13 40.615,142.416 40.615,161.59 40.894,161.878 74.193,161.878 74.193,109.593 74.177,109.576 74.168,109.567 74.168,108.71 74.168,108.658 73.406,107.871 73.057,107.51 72.177,107.51 27.972,107.51 27.965,107.504 27.94,107.53 27.305,107.53 27.178,107.53 26.492,108.238 26.16,108.581 26.16,109.569
GND on Top Layer "Top Layer-No Net" (solid, remove dead copper, pour order 9): 42.27,108.179 49.2,108.179 49.251,108.234 49.225,108.206 49.225,99.119 43.932,99.119 43.857,99.036 43.806,99.091 43.101,99.091 42.95,99.091 42.245,99.867 41.873,100.276 41.873,101.114 41.873,108.311 41.867,108.317
5V on Top Layer "Top Layer-No Net" (solid, remove dead copper, pour order 13): 50.895,106.764 50.895,99.154 50.972,99.085 51.05,99.154 56.287,99.154 57.272,99.154 57.816,99.632 58.283,100.042 58.283,100.361 58.283,101.113 58.438,101.25 58.406,101.278 58.406,106.263 55.328,106.263 54.679,106.832 54.602,106.764 50.972,106.764
GND on Top Layer "Top Layer-No Net" (solid, remove dead copper, pour order 15): 41.605,145.593 27.965,145.593 28.077,145.783 28.077,155.688 28.077,161.609 28.032,161.684 28.143,161.874 40.76,161.874 40.76,147.718 40.582,147.414